# Altium PCB VT 8S RHS Bot V0.1.PcbDoc
Units mm, origin at the board's own origin, x right, y up, seen from the top; angles counter-clockwise.
Board outline 144.93 x 109 mm, 2 copper layers (Top Layer, Bottom Layer), stack 0.049 mm thick; 6 components, 5 nets, 17 pads, 30 vias.
Unrouted connection lines stored in the file: 13.
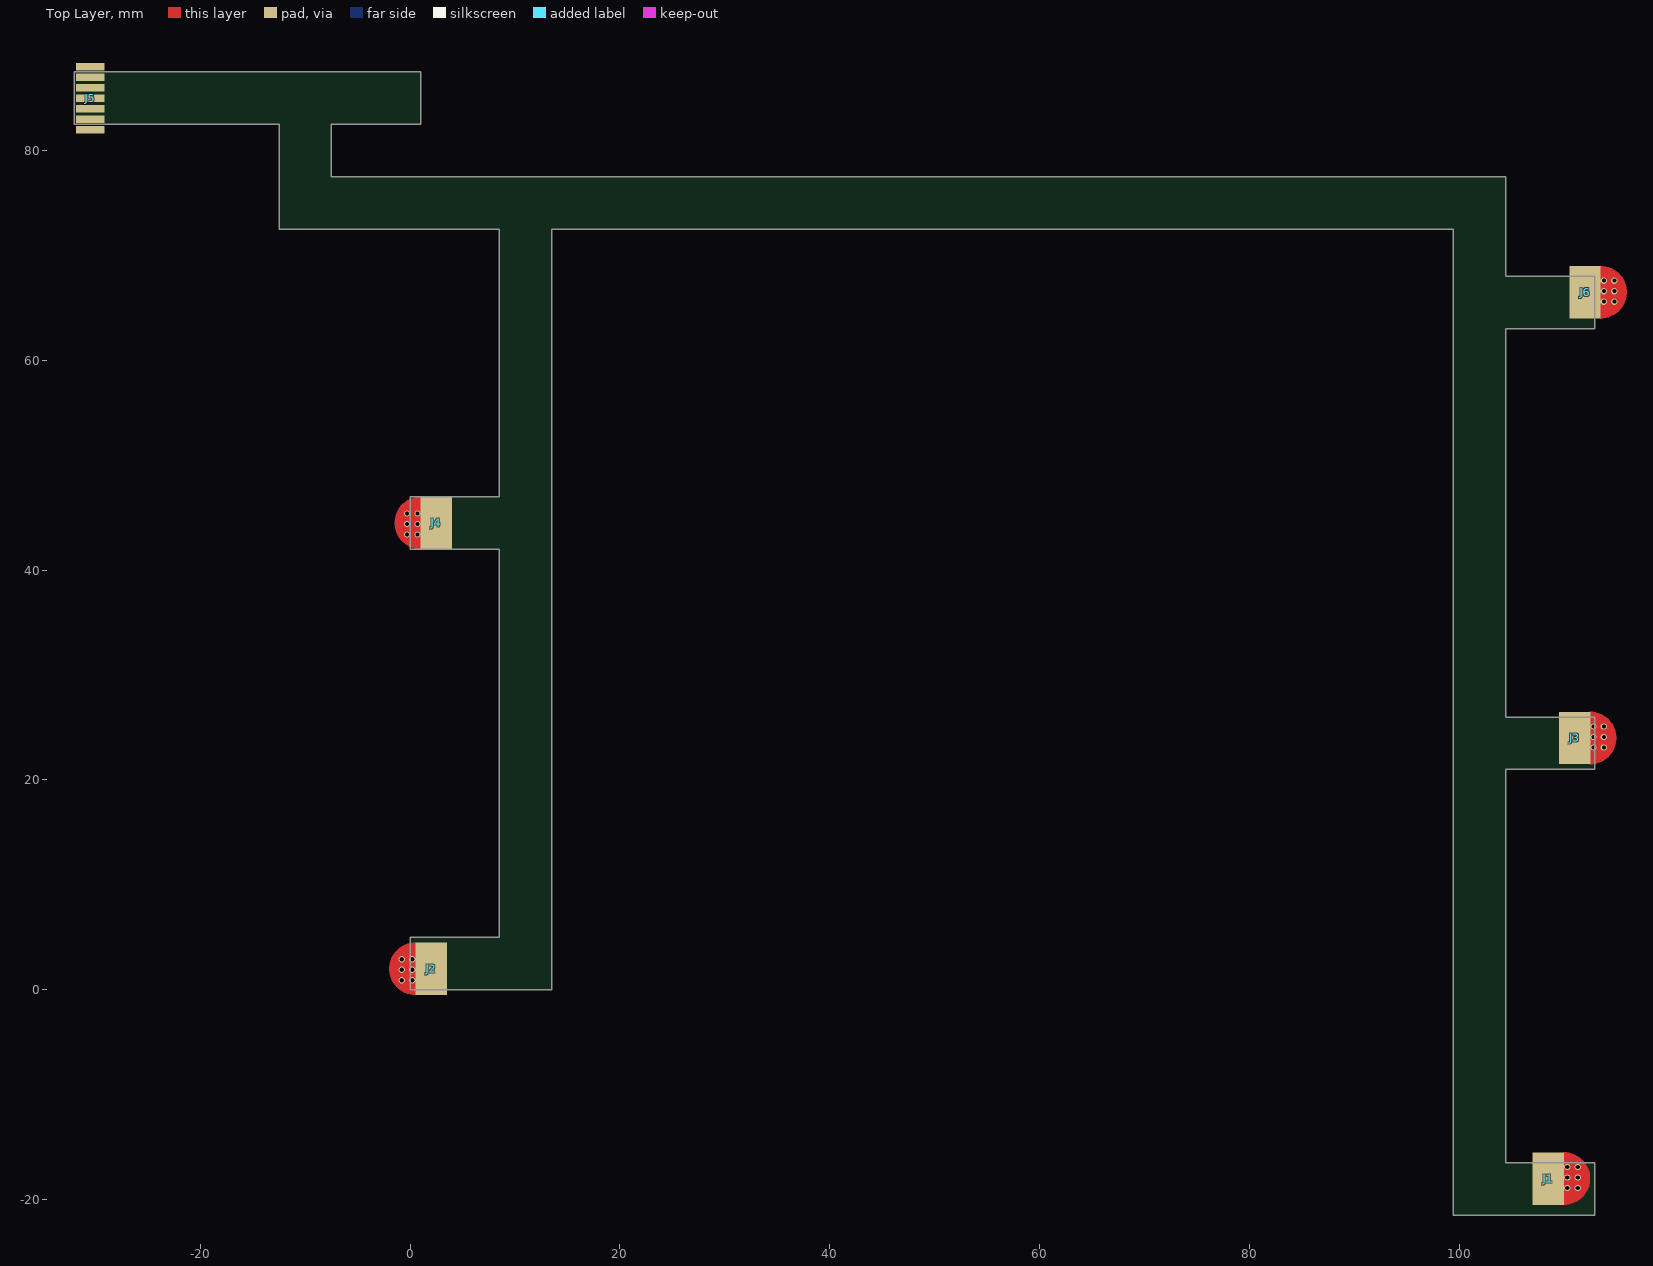
[diagram p0: Top Layer view]
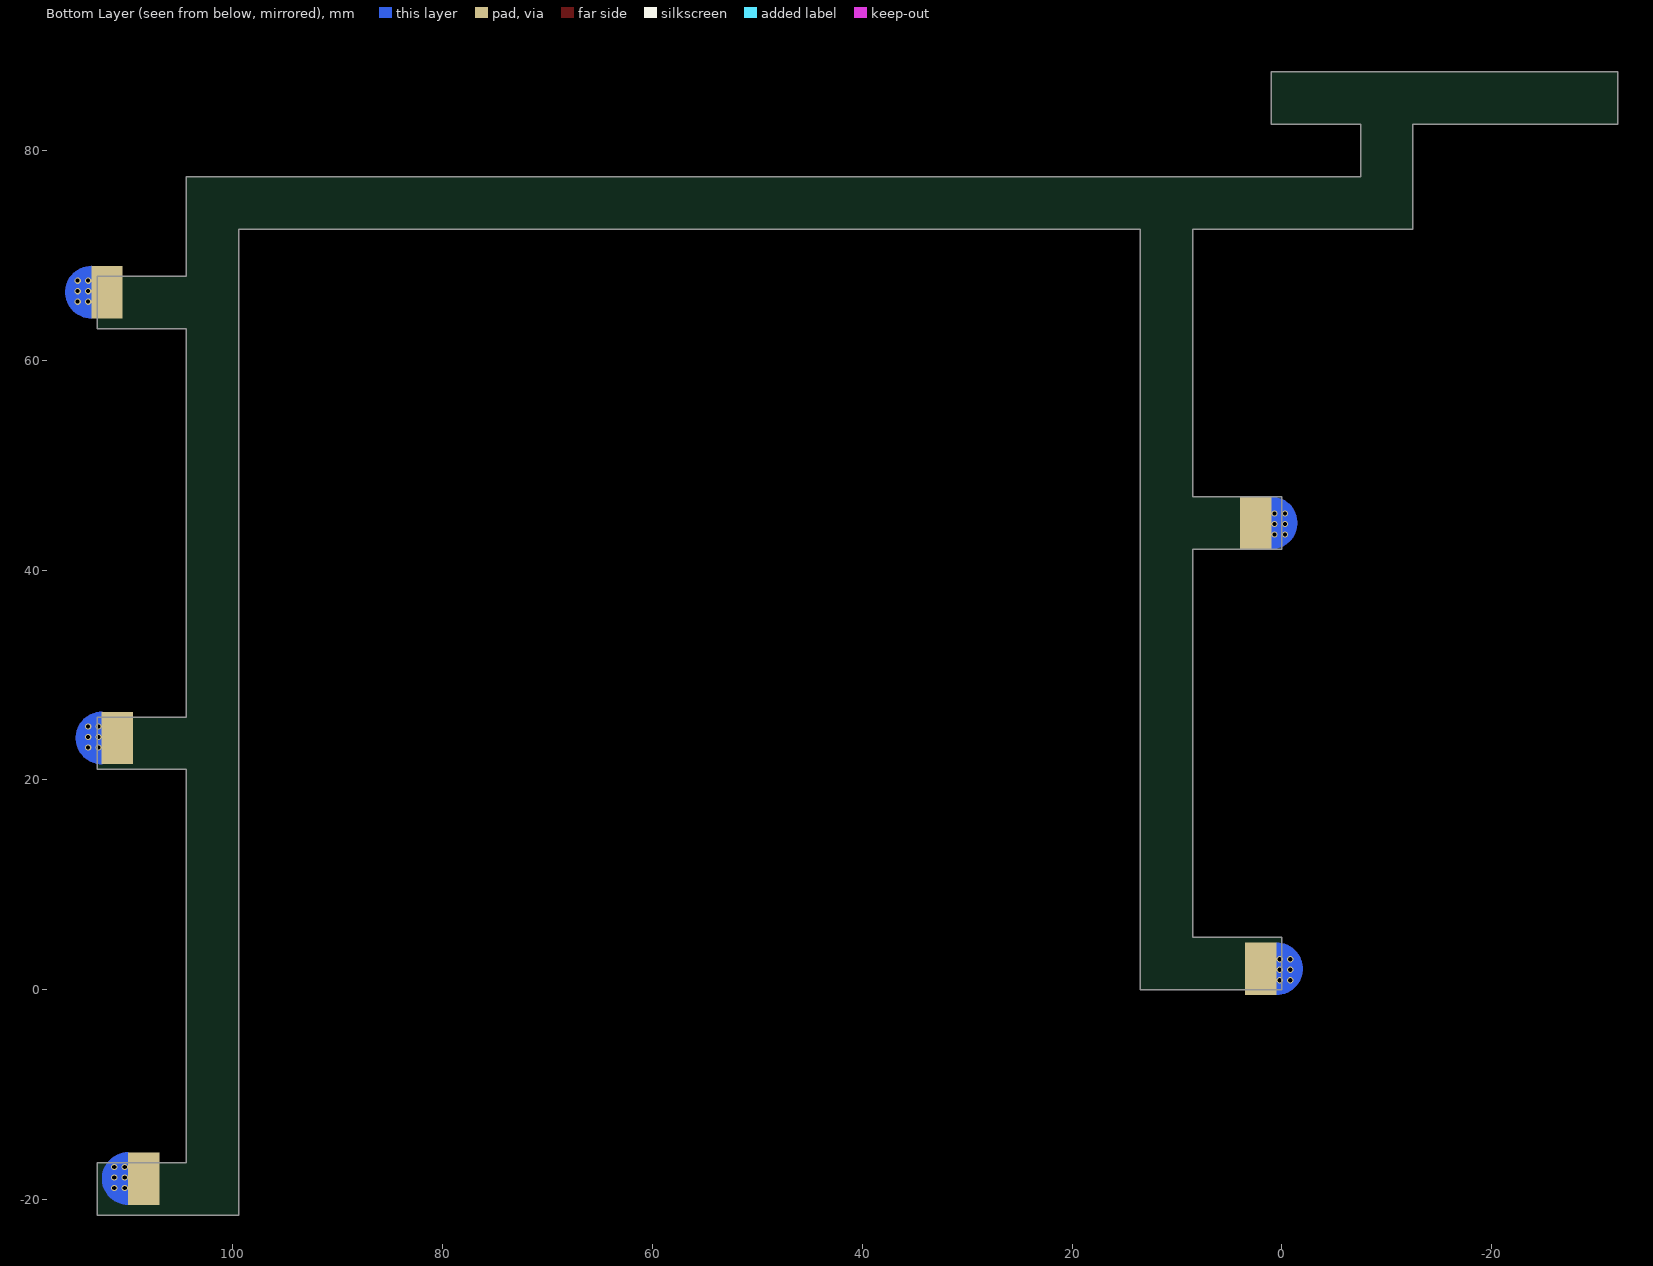
[diagram p1: Bottom Layer view, seen from below]

## Layer stack, top to bottom
Top Solder: solder mask 0.0275, Polyimide, Dk 3.5
Top Layer: signal copper 0.012
Dielectric 1: dielectric 0.025, Polyimide, Dk 3.3
Bottom Layer: signal copper 0.012
Bottom Solder: solder mask 0.0275, Polyimide, Dk 3.5

## Board outline
0,0 0,5 8.5,5 8.5,42 0,42 0,47 8.5,47 8.5,72.5 -12.5,72.5 -12.5,82.5 -32,82.5 -32,87.5 1,87.5 1,82.5 -7.5,82.5 -7.5,77.5 104.425,77.5 104.425,68 112.925,68 112.925,63 104.425,63 104.425,26 112.925,26 112.925,21 104.425,21 104.425,-16.5 112.925,-16.5 112.925,-21.5 99.425,-21.5 99.425,72.5 13.5,72.5 13.5,0

## Design rules (kind name [scope] priority, off if disabled: settings)
Clearance [All] p1: gap=0.152 ignorepadtopadclearanceinfootprint=FALSE
DiffPairsRouting [All] p1: maxlimit=0.254 minlimit=0.254 mostfreqgap=0.254 toplayer_minwidth=0.381 toplayer_maxwidth=0.381 toplayer_prefwidth=0.381 bottomlayer_minwidth=0.381 bottomlayer_maxwidth=0.381 bottomlayer_prefwidth=0.381 substack1={34D787CE-2DC0-4B00-A6B0-2647A249037B} toplayer_{34d787ce-2dc0-4b00-a6b0-2647a249037b}_minwidth=0.381 toplayer_{34d787ce-2dc0-4b00-a6b0-2647a249037b}_maxwidth=0.381 toplayer_{34d787ce-2dc0-4b00-a6b0-2647a249037b}_prefwidth=0.381 bottomlayer_{34d787ce-2dc0-4b00-a6b0-2647a249037b}_minwidth=0.381 bottomlayer_{34d787ce-2dc0-4b00-a6b0-2647a249037b}_maxwidth=0.381 bottomlayer_{34d787ce-2dc0-4b00-a6b0-2647a249037b}_prefwidth=0.381 maxuncoupledlength=12.7
HoleToHoleClearance [All] p1: gap=0.254 allowstackedmicrovias=FALSE
PolygonConnect [All] p1: connectstyle=Direct reliefconductorwidth=0.254 reliefentries=4 polygonreliefangle="90 Angle" airgapwidth=0.254
RoutingVias [All] p1: holewidth=0.4 width=0.7 viastyle="Through Hole" minholewidth=0.2 minwidth=0.4 maxholewidth=1 maxwidth=1.2
SolderMaskExpansion SolderMaskExpansion_Via [IsVia] p1: expansion=0.102 istentingtop=TRUE
SolderMaskExpansion [All] p2: expansion=0.051 istentingtop=FALSE
Width [All] p1: maxlimit=2.54 minlimit=0.152 preferedwidth=0.254 substack1={34D787CE-2DC0-4B00-A6B0-2647A249037B}
28 further rules are at their usual default settings.

## Components (designator, comment, footprint, x,y, rotation, side; value= is the part's Value field where it differs from the comment)
J1 "Voltage Tap" "Voltage Tap" 108.5,-18 r180 top
J2 "Voltage Tap" "Voltage Tap" 2,2 r0 top
J3 "Voltage Tap" "Voltage Tap" 111,24 r180 top
J4 "Voltage Tap" "Voltage Tap" 2.5,44.5 r0 top
J5 "84953-7-FPC" "84953-7 - FPC" -30.5,85 r90 top
J6 "Voltage Tap" "Voltage Tap" 112,66.5 r180 top

## Footprints (in the part's own frame and the unit in brackets; to place one, negate y for a bottom-side part, rotate by r counter-clockwise, add the part's x,y. Pads: shape width x height; smd on the part's side, far side on the other; paste and mask are expansions set on the pad)
"84953-7 - FPC" [mm] "FPC Connectors, Flex-to-Board, 7 Position, .039 in [1 mm] Centerline, FPC Connector, Top Contact"
  rect 0.71x2.7 smd: 1(-3,0) 2(-2,0) 3(-1,0) 4(0,0) 5(1,0) 6(2,0) 7(3,0)
"Voltage Tap" [mm] "Voltage Tap"
  rect 3x5 smd mask+0: 1(0,0)
  rect 3x5 smd far side mask+0: 1(0,0)
  Top Layer region: -1.475,2.5 -1.475,-2.5 -2.56,-2.252 -3.43,-1.559 -3.912,-0.556 -3.912,0.556 -3.43,1.559 -2.56,2.252 -1.475,2.5
  Bottom Layer region: -1.475,2.5 -1.475,-2.5 -2.56,-2.252 -3.43,-1.559 -3.912,-0.556 -3.912,0.556 -3.43,1.559 -2.56,2.252 -1.475,2.5
  Bottom Layer region: -1.475,2.5 -1.475,-2.5 -2.56,-2.252 -3.43,-1.559 -3.912,-0.556 -3.912,0.556 -3.43,1.559 -2.56,2.252 -1.475,2.5

## Part data
J5: "FPC Connectors, Flex-to-Board, 7 Position, .039 in [1 mm] Centerline, FPC Side Connector"

## Via types
v1: diameter 0.6, hole 0.4, Top Layer to Bottom Layer, tented both sides, 30 vias

## Nets (pads, with @x,y where several pads share a name; then routed paths per layer and width w, separated by ;. In a path a pad name is that pad's centre, name@x,y a point inside that pad or via, vN(x,y) a via of type N, cw(c..) or ccw(c..) an arc to the next point about the centre after c; other vN are vias at no path point)
NetJ1_1: J1.1 J5.1 J5.2 J5.3
  other v1: 110.3,-18.9 111.3,-18.9 110.3,-17.9 111.3,-17.9 110.3,-16.9 111.3,-16.9
NetJ2_1: J2.1 J5.4
  other v1: -0.8,0.9 0.2,0.9 -0.8,1.9 0.2,1.9 -0.8,2.9 0.2,2.9
NetJ3_1: J3.1 J5.5
  other v1: 112.8,23.1 113.8,23.1 112.8,24.1 113.8,24.1 112.8,25.1 113.8,25.1
NetJ4_1: J4.1 J5.6
  other v1: -0.3,43.4 0.7,43.4 -0.3,44.4 0.7,44.4 -0.3,45.4 0.7,45.4
NetJ5_7: J5.7 J6.1
  other v1: 113.8,65.6 114.8,65.6 113.8,66.6 114.8,66.6 113.8,67.6 114.8,67.6

## Silkscreen, mask and mechanical layers (free items; w line width, h text height)
Board Shape:
  the board outline again, w0.013
Mechanical Colab:
  lines w0.013: 19.785,72.5 19.785,77.5 ; 23.005,72.5 23.005,77.5 ; 93.705,72.5 93.705,77.5 ; 96.925,72.5 96.925,77.5 ; -32,82.5 -12.5,82.5 -12.5,72.5 8.5,72.5 8.5,47 0,47 0,42 8.5,42 8.5,5 0,5 0,0 13.5,0 13.5,72.5 99.425,72.5 99.425,-21.5 112.925,-21.5 112.925,-16.5 104.425,-16.5 104.425,21 112.925,21 112.925,26 104.425,26 104.425,63 112.925,63 112.925,68 104.425,68 104.425,77.5 -7.5,77.5 -7.5,82.5 1,82.5 1,87.5 -32,87.5 -32,82.5

## Text inside footprints (layer, text, board x,y; h text height)
J5: Stiffener Backing "Total FPC width on stiffener / 0.3mm +- 0.05mm" at -32.3,80.025 h1 r90